# EAGLE board TA-1042-8P8C_V4 (EAGLE 9.6.2)
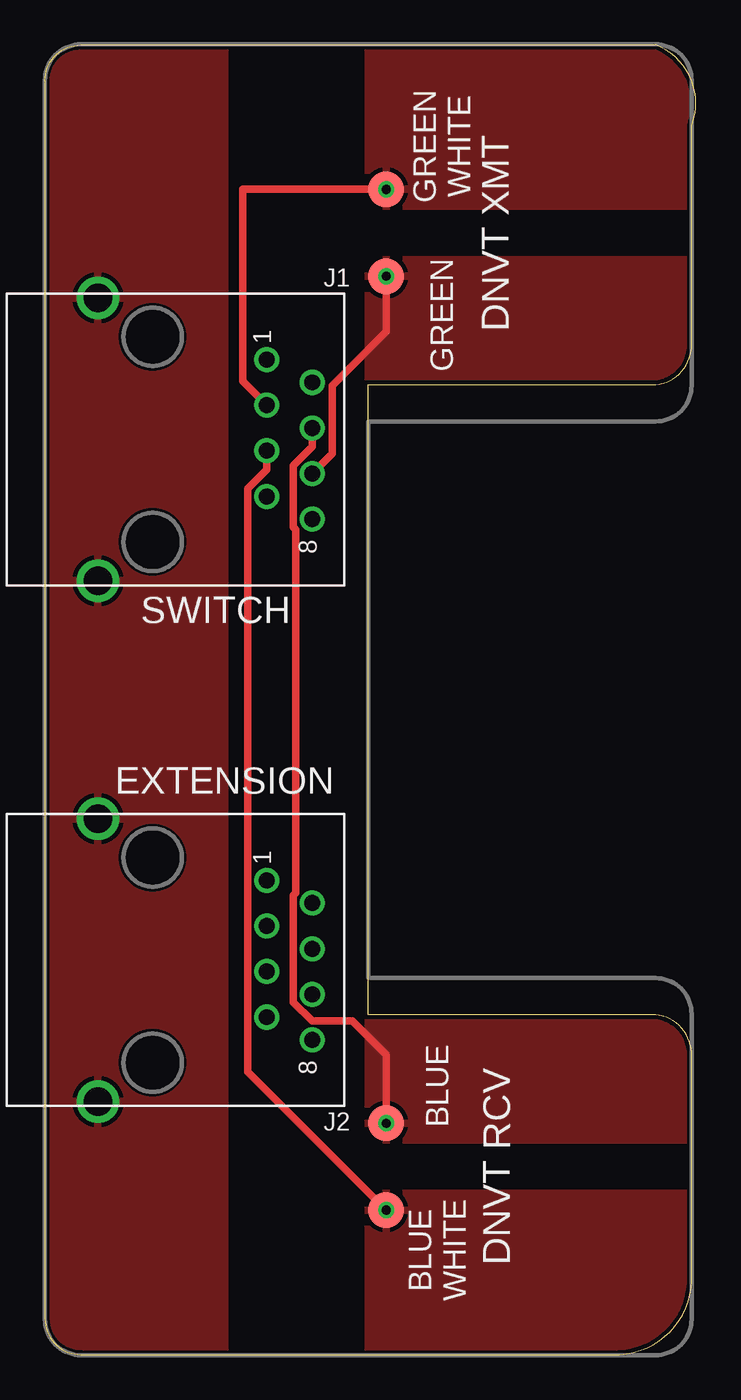
[diagram p0: board, top side]
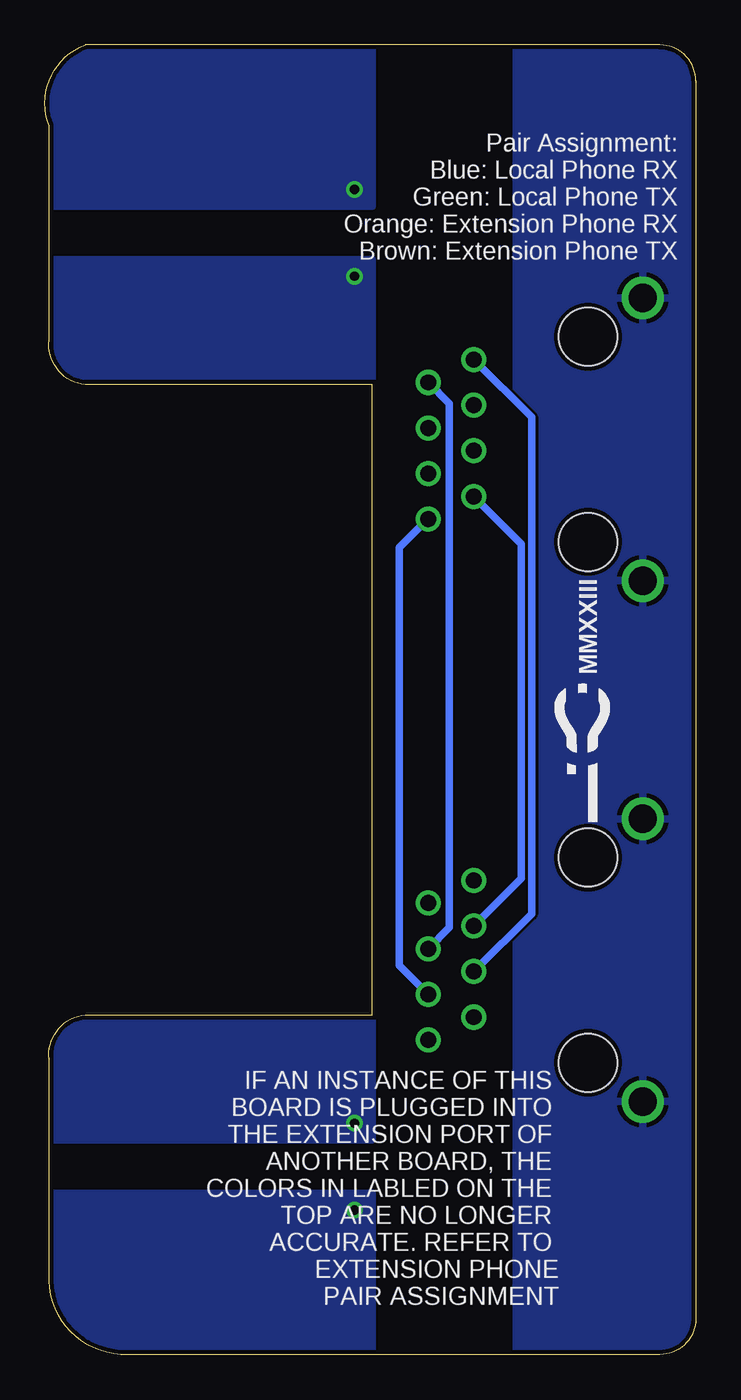
[diagram p1: board, bottom side, seen from below]

Size 36.23 x 72.94 mm. Coordinates in mm from the lower left corner, seen from the top.
Outline: 0,68.43 0,4.51
Outline: 0,70.94 0,2 arc90 2,0 32,0 arc90 36,4.51 36,16.43 arc90 34,18.93 18,18.93 18,54.01 34,54.01 arc90 36,56.51 36,68.43 arc90 34,72.94 2,72.94 arc90 0,70.94
Copper layers (1*16): Top 0.035mm / dielectric 1.5mm / Bottom 0.035mm
Design rules "default *": minimum track width 6mil, minimum drill 0.35mm, track to track 6mil, track to pad 6mil, pad to pad 6mil, via to via 6mil, smd to smd 6mil, copper to edge 10mil, drill to drill 6mil, minimum pad ring 10mil, minimum via ring 8mil, stop-mask expansion 4mil, vias tented up to drill 0mil, thermal gap 10mil

## Footprints (pad centres in the part's own frame; a part is rotated, then mirrored left to right if it is on the bottom)
TP20R = smd 2 x 2: TP 0,0
5555153-1 = drill 0.889: 1 -4.445,6.35; 2 -3.175,8.89; 3 -1.905,6.35; 4 -0.635,8.89; 5 0.635,6.35; 6 1.905,8.89; 7 3.175,6.35; 8 4.445,8.89 | drill 1.575: S1 -7.874,-3.048; S2 7.874,-3.048 | hole 3.251: -5.715,0; 5.715,0

## Placement (x,y rotation side)
BLUE  TPTP20R  [TP20R]  19,12.89 0 top
BLUE-WHITE  TPTP20R  [TP20R]  19,8.05 0 top
GREEN  TPTP20R  [TP20R]  19,60.05 0 top
GREEN-WHITE  TPTP20R  [TP20R]  19,64.89 0 top
J1  5555153-1  [5555153-1]  6,50.97 270 top
J2  5555153-1  [5555153-1]  6,21.97 270 top

## Library data of the parts
BLUE BLUE-WHITE GREEN GREEN-WHITE = testpad
J1 J2 = ruark2; PARTNO: A31438-ND

## Nets
BLUE: BLUE.TP J1.4
BLUE-WHITE: BLUE-WHITE.TP J1.5
BROWN: J1.8 J2.6
BROWN-WHITE: J1.7 J2.3
GND: J1.S1 J1.S2 J2.S1 J2.S2
GREEN: GREEN.TP J1.6
GREEN-WHITE: GREEN-WHITE.TP J1.3
ORANGE: J1.2 J2.4
ORANGE-WHITE: J1.1 J2.5

## Tracks (layer width: path | path; a pad name or v marks a point on that pad's centre or on a via)
BLUE  (via drill 0.51)
  Top 0.406: J1.4 14.89,50.55 13.84,49.5 13.84,46.09 13.98,45.94 13.98,25.72 13.84,25.58 13.84,19.63 14.88,18.58 17.11,18.58 19,16.68 BLUE.TP
  other vias: 19,12.89
  pour Top: 36,21.97 18,21.97 18,11.97 36,11.97
  pour Bottom: 36,21.97 18,21.97 18,11.97 36,11.97
BLUE-WHITE  (via drill 0.51)
  Top 0.406: J1.5 12.35,49.28 11.3,48.23 11.3,15.75 BLUE-WHITE.TP
  other vias: 19,8.05
  pour Top: 36,8.97 18,8.97 18,-1.03 36,-1.03
  pour Bottom: 36,8.97 18,8.97 18,-1.03 36,-1.03
BROWN
  Bottom 0.406: J2.6 16.51,21.68 16.51,44.94 14.93,46.52 J1.8
BROWN-WHITE
  Bottom 0.406: J2.3 9.7,26.52 9.7,45.15 J1.7
GND
  pour Top: 0,73.97 10,73.97 10,-1.03 0,-1.03
  pour Bottom: 0,73.97 10,73.97 10,-1.03 0,-1.03
GREEN  (via drill 0.51)
  Top 0.406: J1.6 16,50.17 16,53.97 19,56.97 GREEN.TP
  other vias: 19,60.05
  pour Top: 36,60.97 18,60.97 18,50.97 36,50.97
  pour Bottom: 36,60.97 18,60.97 18,50.97 36,50.97
GREEN-WHITE  (via drill 0.51)
  Top 0.406: J1.3 11,54.22 11,64.89 GREEN-WHITE.TP
  other vias: 19,64.89
  pour Top: 36,73.97 18,73.97 18,63.97 36,63.97
  pour Bottom: 36,73.97 18,73.97 18,63.97 36,63.97
ORANGE
  Bottom 0.406: J2.4 13.72,23.78 13.72,52.97 J1.2
ORANGE-WHITE
  Bottom 0.406: J1.1 9.14,52.21 9.14,24.54 J2.5

## Text on the board
tPlace: GREEN / WHITE | GREEN | BLUE | BLUE / WHITE
bPlace: MMXXIII
tNames: DNVT XMT | SWITCH | EXTENSION | DNVT RCV
bNames: Pair Assignment: / Blue: Local Phone RX / Green: Local Phone TX / Orange: Extension Phone RX / Brown: Extension Phone TX | IF AN INSTANCE OF THIS / BOARD IS PLUGGED INTO / THE EXTENSION PORT OF / ANOTHER BOARD, THE / COLORS IN LABLED ON THE / TOP ARE NO LONGER / ACCURATE. REFER TO / EXTENSION PHONE / PAIR ASSIGNMENT
bStop: 021